# EAGLE board MedBee_Round_Charger_ESP32_mic5350_v12 (EAGLE 9.2.2), part 1 of 2
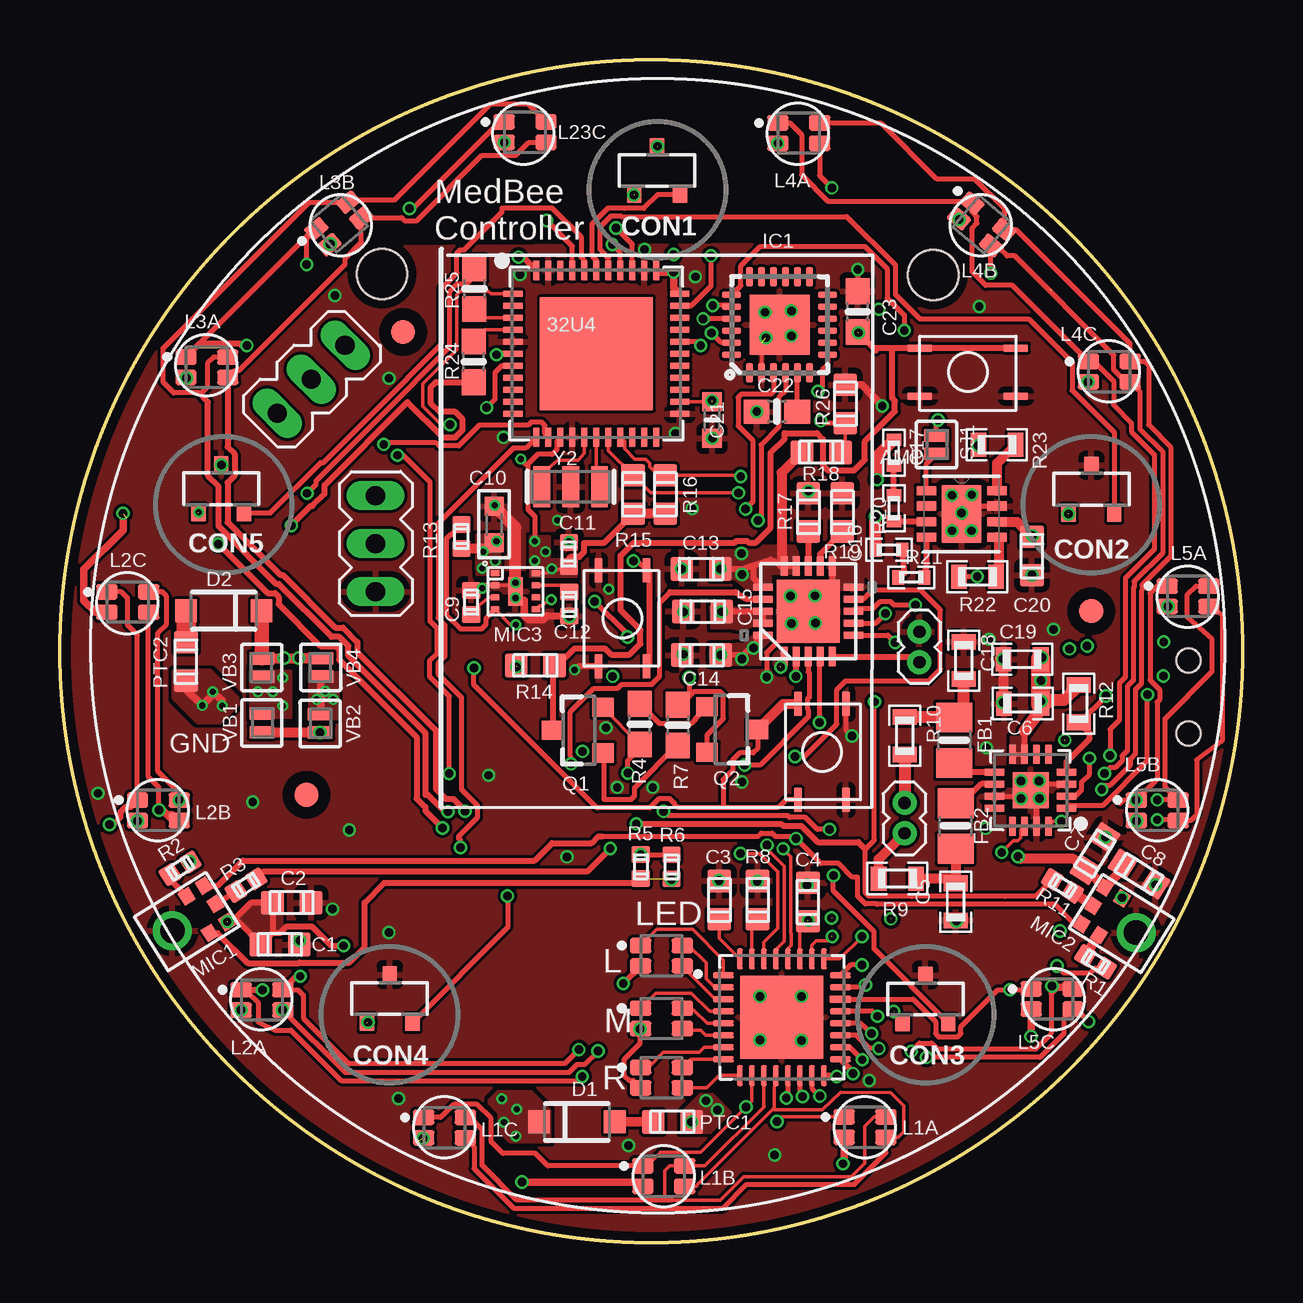
[diagram p0: board, top side]
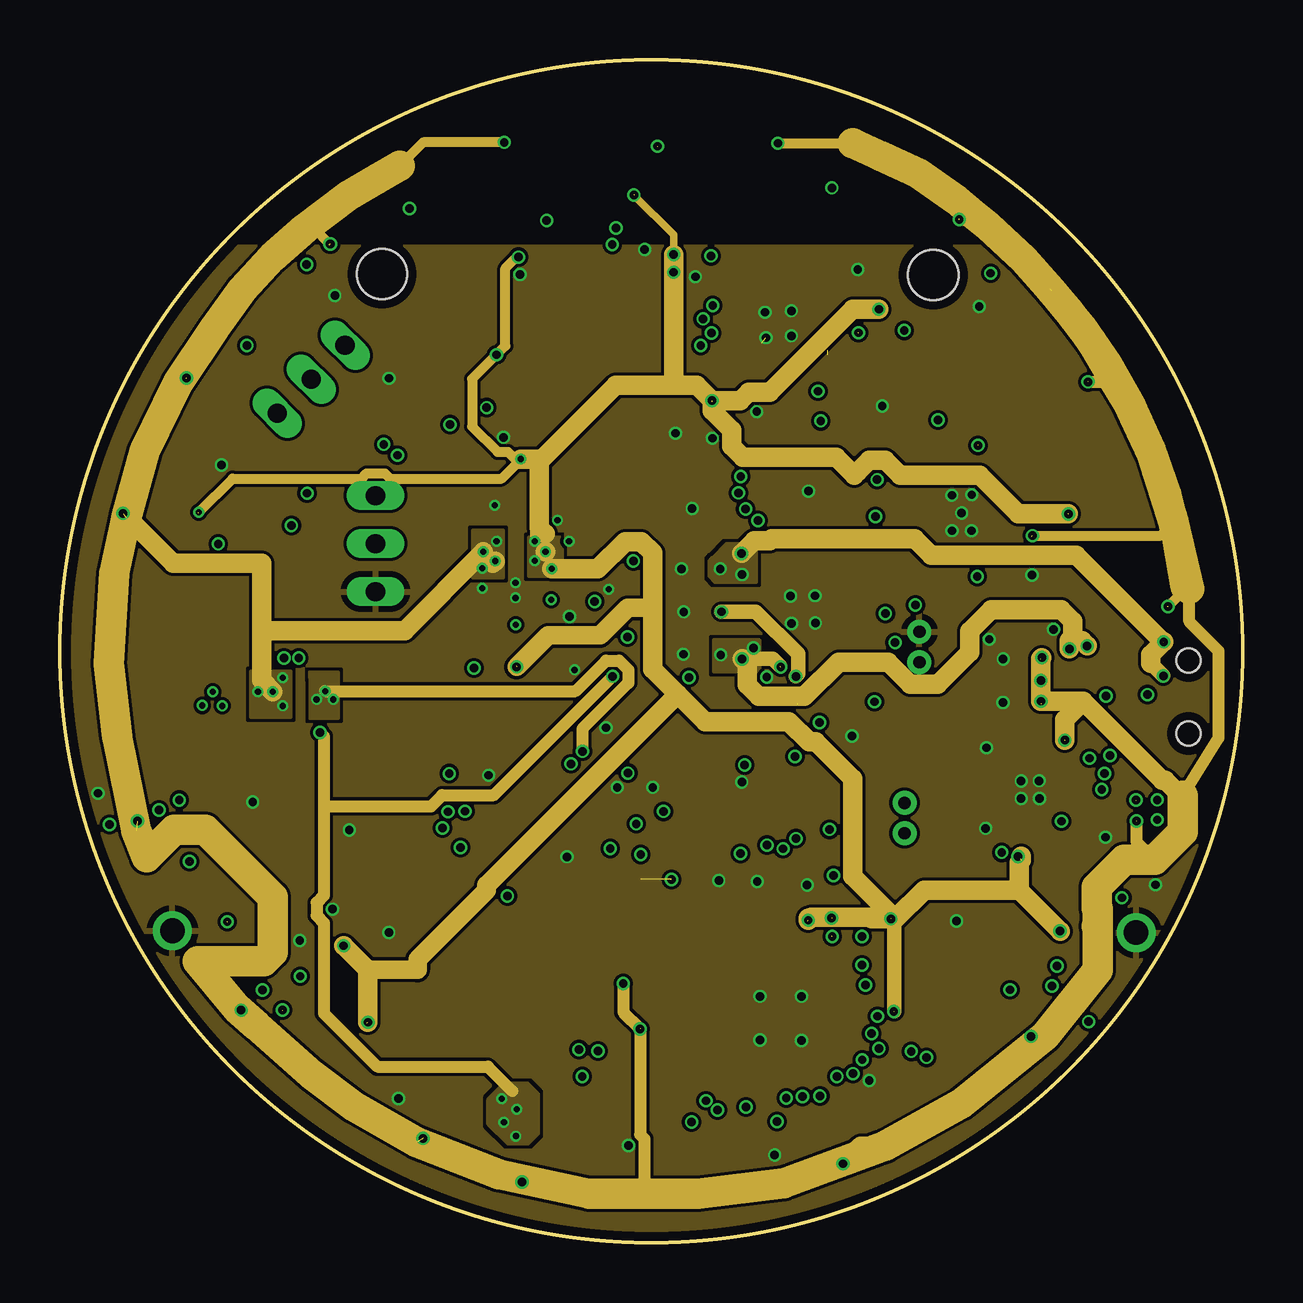
[diagram p1: board, inner layer Route2]
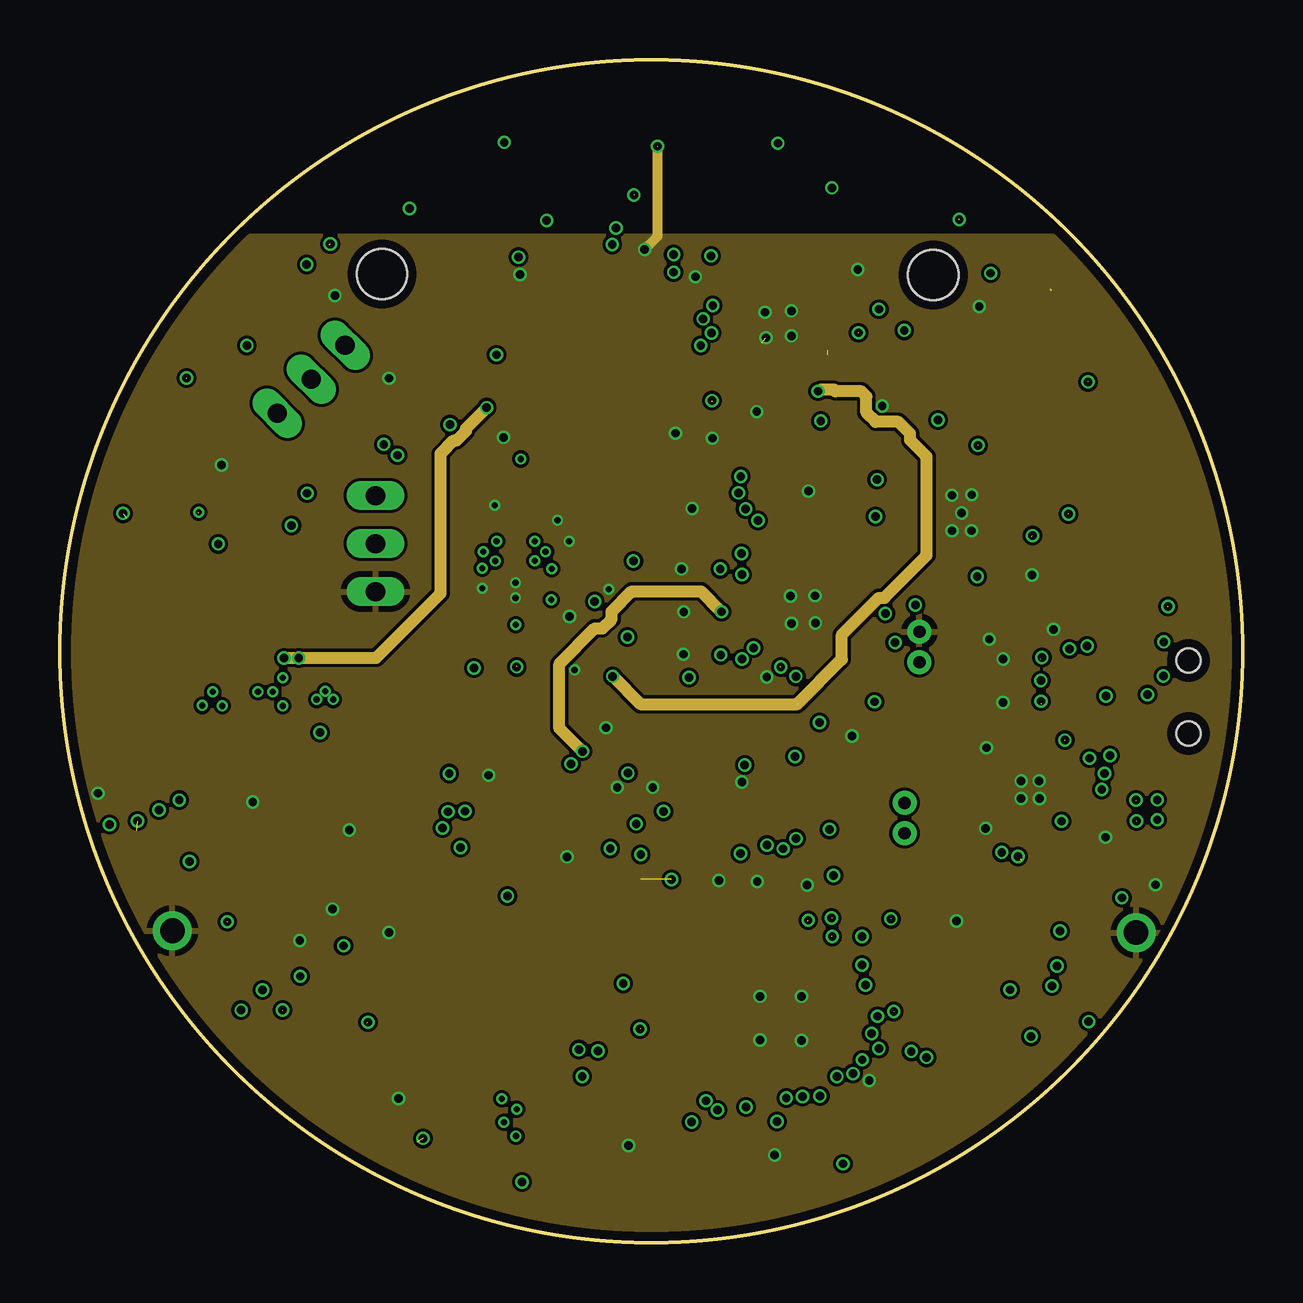
[diagram p2: board, inner layer Route15]
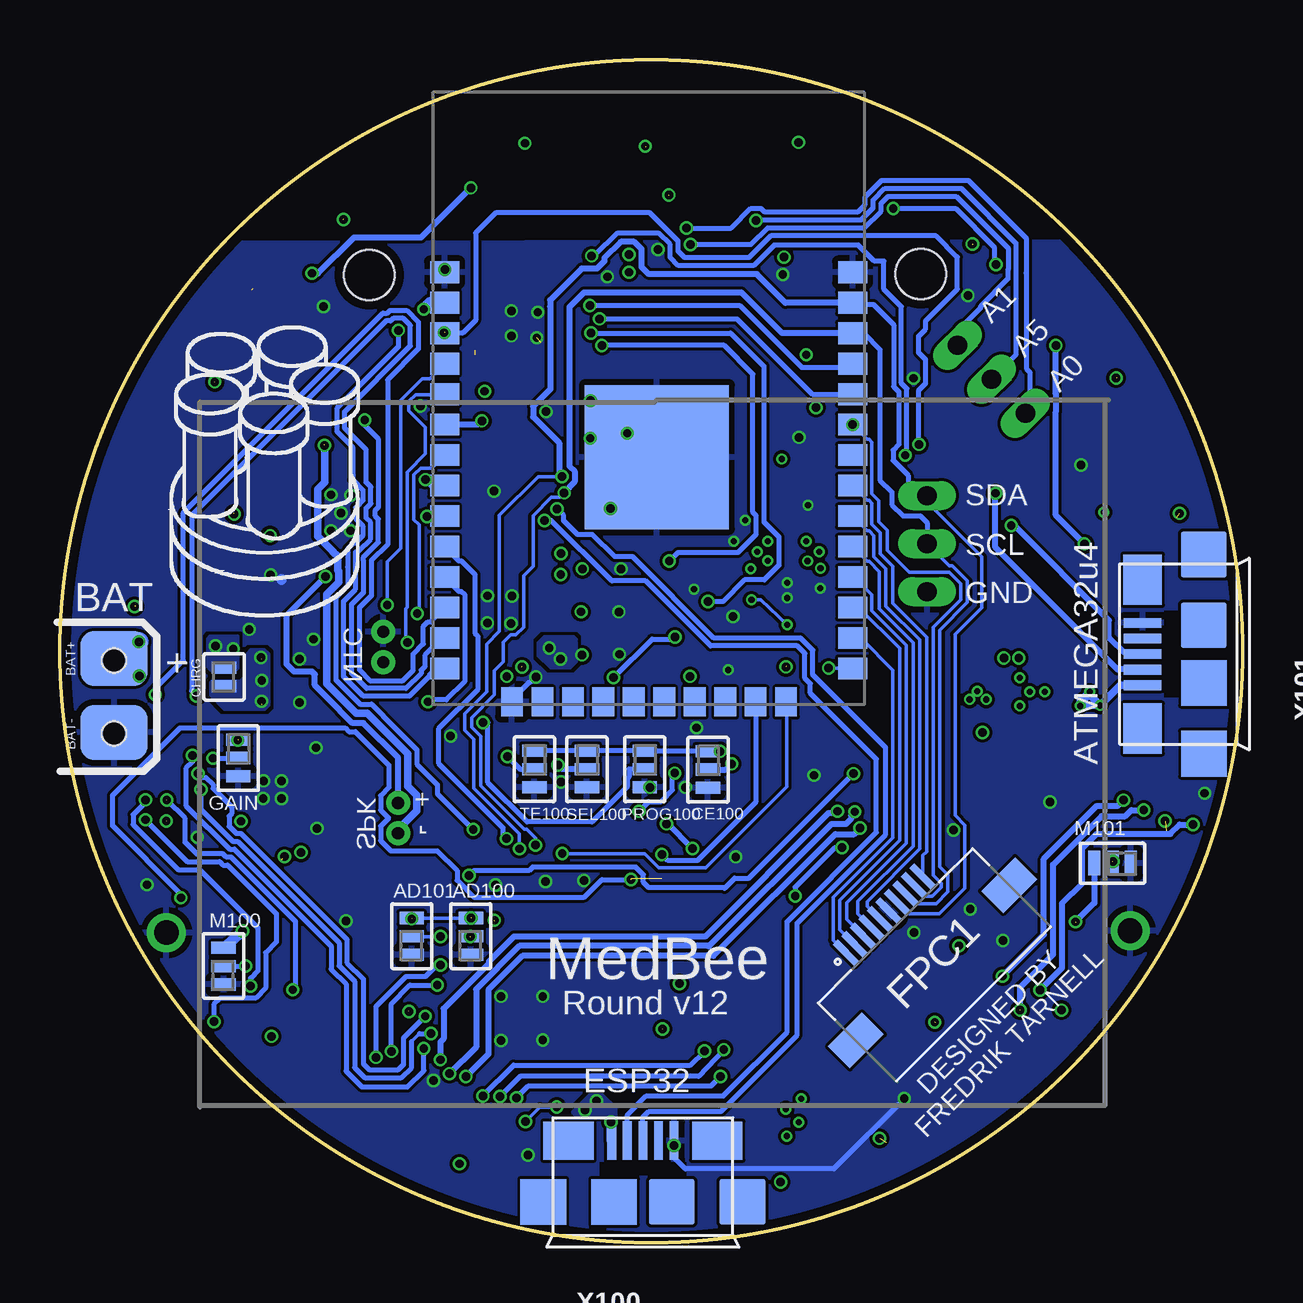
[diagram p3: board, bottom side, seen from below]

Size 49.28 x 49.28 mm. Coordinates in mm from the lower left corner, seen from the top.
Outline: circle at 24.64,24.64 radius 24.64
Copper layers (1*2*15*16): Top 0.035559375mm / dielectric 0.17018125mm / Route2 0.01778125mm / dielectric 47mil / Route15 0.01778125mm / dielectric 0.17018125mm / Bottom 0.035559375mm
Design rules "OSHPark-4layer *": minimum track width 5mil, minimum drill 10mil, track to track 5mil, track to pad 5mil, pad to pad 5mil, via to via 5mil, smd to smd 5mil, copper to edge 15mil, drill to drill 6mil, minimum pad ring 4mil, minimum via ring 4mil, stop-mask expansion 2.5mil, vias tented up to drill 0.4mm, thermal gap 10mil
Net classes: 1 IN: width 0.154 mm; 2 gnd: width 0.102 mm, drill 0.1 mm; 3 usbvcc: width 0.102 mm, drill 0.1 mm, clearance 0.15 mm
Holes 2.1 mm at 36.39,40.32 13.41,40.36

## Footprints (pad centres in the part's own frame; a part is rotated, then mirrored left to right if it is on the bottom)
TQFN44_7MM = smd 0.25 x 0.8: 1 -2.5,-3.475; 2 -2,-3.475; 3 -1.5,-3.475; 4 -1,-3.475; 5 -0.5,-3.475; 6 0,-3.475; 7 0.5,-3.475; 8 1,-3.475; 9 1.5,-3.475; 10 2,-3.475; 11 2.5,-3.475; 23 2.5,3.475; 24 2,3.475; 25 1.5,3.475; 26 1,3.475; 27 0.5,3.475; 28 0,3.475; 29 -0.5,3.475; 30 -1,3.475; 31 -1.5,3.475; 32 -2,3.475; 33 -2.5,3.475 | smd 0.8 x 0.25: 12 3.475,-2.5; 13 3.475,-2; 14 3.475,-1.5; 15 3.475,-1; 16 3.475,-0.5; 17 3.475,0; 18 3.475,0.5; 19 3.475,1; 20 3.475,1.5; 21 3.475,2; 22 3.475,2.5; 34 -3.475,2.5; 35 -3.475,2; 36 -3.475,1.5; 37 -3.475,1; 38 -3.475,0.5; 39 -3.475,0; 40 -3.475,-0.5; 41 -3.475,-1; 42 -3.475,-1.5; 43 -3.475,-2; 44 -3.475,-2.5 | smd 4.7 x 4.7: THERMAL 0,0
PH_2MM_M03 = drill 0.8 long: P$1 0,2.19; P$2 0,0.19; P$3 0,-1.81
QFN20_4X4MC = smd 0.813 x 0.305: 1 -1.892,1; 2 -1.892,0.5; 3 -1.892,0; 4 -1.892,-0.5; 5 -1.892,-1; 11 1.892,-1; 12 1.892,-0.5; 13 1.892,0; 14 1.892,0.5; 15 1.892,1 | smd 0.305 x 0.813: 6 -1,-1.892; 7 -0.5,-1.892; 8 0,-1.892; 9 0.5,-1.892; 10 1,-1.892; 16 1,1.892; 17 0.5,1.892; 18 0,1.892; 19 -0.5,1.892; 20 -1,1.892 | smd 2.642 x 2.642: 21 0,0
SOLDERJUMPER-2WAY_SMALL = smd 0.508 x 1.016: 1 -0.813,0; 2 -0.051,0; 3 0.711,0
SON65P300X300X100-9N = smd 0.813 x 0.381: 1 -1.473,0.965; 2 -1.473,0.33; 3 -1.473,-0.33; 4 -1.473,-0.965; 5 1.473,-0.965; 6 1.473,-0.33; 7 1.473,0.33; 8 1.473,0.965 | smd 1.651 x 2.388: 9 0,0
BUTT_TACT_3X3MM = smd 0.3 x 1: SIDE1 -1,2; SIDE1@1 -1,-2; SIDE2 1,2; SIDE2@1 1,-2
C0603 = smd 1 x 0.95: 1 0,0.8; 2 0,-0.8
0603 = smd 0.65 x 1: 1 -0.775,0; 2 0.775,0
C0402 = smd 0.75 x 0.7: 1 0,0.5; 2 0,-0.5
C0603' = smd 0.8 x 0.8: 1 -0.762,0; 2 0.762,0
0402 = smd 0.5 x 0.6: 1 -0.55,0; 2 0.55,0
_0603MP = smd 0.8 x 0.8: 1 -0.762,0; 2 0.762,0
0603-NO = smd 1.075 x 1: 1 -0.85,0; 2 0.85,0
SOLDERJUMPER-1WAY-SMALL = smd 0.508 x 1.016: 1 -0.813,0; 2 -0.051,0
SOT23-R = smd 0.6 x 0.7: 1 -0.95,-1; 2 0.95,-1; 3 0,1
SOD-123 = smd 0.9 x 0.95: A 1.575,0; C -1.575,0
0805-NO = smd 1.24 x 1.5: 1 -0.95,0; 2 0.95,0
FIDUCIAL_1MM = smd 1 x 1: 1 0,0
MOLEX-FPC-10PIN-0.5MM-PITCH-CONNECTOR = smd 0.3 x 1.3: 1 -2.25,2.54; 2 -1.75,2.54; 3 -1.25,2.54; 4 -0.75,2.54; 5 -0.25,2.54; 6 0.25,2.54; 7 0.75,2.54; 8 1.25,2.54; 9 1.75,2.54; 10 2.25,2.54 | smd 2 x 1.3: Z1 -4.542,-0.317; Z2 4.55,-0.26
QFN24_4MM_SMSC = smd 0.8 x 0.28: 1 -2,1.25; 2 -2,0.75; 3 -2,0.25; 4 -2,-0.25; 5 -2,-0.75; 6 -2,-1.25; 13 2,-1.25; 14 2,-0.75; 15 2,-0.25; 16 2,0.25; 17 2,0.75; 18 2,1.25 | smd 0.28 x 0.8: 7 -1.25,-2; 8 -0.75,-2; 9 -0.25,-2; 10 0.25,-2; 11 0.75,-2; 12 1.25,-2; 19 1.25,2; 20 0.75,2; 21 0.25,2; 22 -0.25,2; 23 -0.75,2; 24 -1.25,2 | smd 2.5 x 2.5: THERM 0,0
LED_0606-RGB = smd 0.89 x 0.64: 1 -0.87,0.425; 2 0.87,0.425; 3 -0.87,-0.425; 4 0.87,-0.425
VQFN-32 = smd 0.88 x 0.26: 1 -2.435,1.75; 2 -2.435,1.25; 3 -2.435,0.75; 4 -2.435,0.25; 5 -2.435,-0.25; 6 -2.435,-0.75; 7 -2.435,-1.25; 8 -2.435,-1.75; 17 2.435,-1.75; 18 2.435,-1.25; 19 2.435,-0.75; 20 2.435,-0.25; 21 2.435,0.25; 22 2.435,0.75; 23 2.435,1.25; 24 2.435,1.75 | smd 0.26 x 0.88: 9 -1.75,-2.435; 10 -1.25,-2.435; 11 -0.75,-2.435; 12 -0.25,-2.435; 13 0.25,-2.435; 14 0.75,-2.435; 15 1.25,-2.435; 16 1.75,-2.435; 25 1.75,2.435; 26 1.25,2.435; 27 0.75,2.435; 28 0.25,2.435; 29 -0.25,2.435; 30 -0.75,2.435; 31 -1.25,2.435; 32 -1.75,2.435 | smd 3.45 x 3.45: 33 0,0
SPH0645LM4H = smd 0.6 x 0.525: 1 -0.9,1.4; 2 -0.9,0.55; 4 0.9,0.55; 5 0.9,1.4; 6 0,1.4 | drill 1.025 pad 1.625: 3 0,-0.71
8PIN-TMLF = smd 1.2 x 0.6: P$0 0,0 | smd 0.25 x 0.35: P$1 -0.75,-0.85; P$2 -0.25,-0.85; P$3 0.25,-0.85; P$4 0.75,-0.85; P$5 0.75,0.85; P$6 0.25,0.85; P$7 -0.25,0.85; P$8 -0.75,0.85
PH_127MM_M02 = drill 0.508 pad 1: 1 0,0; 2 1.27,0
SOT23-3 = smd 0.8 x 0.9: 1 -0.95,-1; 2 0.95,-1; 3 0,1.1
QFN16_3MM = smd 0.8 x 0.28: 1 -1.5,0.75; 2 -1.5,0.25; 3 -1.5,-0.25; 4 -1.5,-0.75; 9 1.5,-0.75; 10 1.5,-0.25; 11 1.5,0.25; 12 1.5,0.75 | smd 0.28 x 0.8: 5 -0.75,-1.5; 6 -0.25,-1.5; 7 0.25,-1.5; 8 0.75,-1.5; 13 0.75,1.5; 14 0.25,1.5; 15 -0.25,1.5; 16 -0.75,1.5 | smd 1.5 x 1.5: THERMAL 0,0
BAT_PCB_PAD_HOLES = smd 2.286 x 2.794: BAT+ -1.981,-0.127; BAT- 1.092,-0.127 | hole 1: 1.143,-0.127; -1.905,-0.127
USB-MICRO = smd 0.4 x 1.6: D+ 0,1.27; D- -0.65,1.27; GND 1.3,1.27; ID 0.65,1.27; VBUS -1.3,1.27 | smd 1.9 x 1.9: SHLD1 -1.2,-1.28; SHLD2 1.2,-1.28; SHLD3 -4.15,-1.28; SHLD4 4.15,-1.28 | smd 2.1 x 1.6: SHLD5 3.1,1.27; SHLD6 -3.1,1.27
WROOM32_SKINNY = smd 1.2 x 0.9: 1 -8.5,5; 2 -8.5,3.73; 3 -8.5,2.46; 4 -8.5,1.19; 5 -8.5,-0.08; 6 -8.5,-1.35; 7 -8.5,-2.62; 8 -8.5,-3.89; 9 -8.5,-5.16; 10 -8.5,-6.43; 11 -8.5,-7.7; 12 -8.5,-8.97; 13 -8.5,-10.24; 14 -8.5,-11.51; 25 8.5,-11.51; 26 8.5,-10.24; 27 8.5,-8.97; 28 8.5,-7.7; 29 8.5,-6.43; 30 8.5,-5.16; 31 8.5,-3.89; 32 8.5,-2.62; 33 8.5,-1.35; 34 8.5,-0.08; 35 8.5,1.19; 36 8.5,2.46; 37 8.5,3.73; 38 8.5,5 | smd 0.9 x 1.2: 15 -5.7,-12.9; 16 -4.43,-12.9; 17 -3.16,-12.9; 18 -1.89,-12.9; 19 -0.62,-12.9; 20 0.65,-12.9; 21 1.92,-12.9; 22 3.19,-12.9; 23 4.46,-12.9; 24 5.73,-12.9 | smd 6 x 6: P$1 0.34,-2.7
RESONATOR-SMD = smd 0.7 x 1.7: 1 -1.2,0; 2 0,0; 3 1.2,0

## Placement (x,y rotation side)
32U4  ATMEGA32U4-MU  [TQFN44_7MM]  22.35,37.03 270 top
$$U$4  PH_2MM_M03  [PH_2MM_M03]  13.15,29.31 180 top
$$U$5  MEDBEE-PLACEMENT  [MEDBEE_ROUND_PLACEMENT]  24.9,24.87 0 top
$$U$6  MCP73871  [QFN20_4X4MC]  31.18,26.31 90 top
$$U$7  PH_2MM_M03  [PH_2MM_M03]  10.6,36.11 135 top
AD100  TE  [SOLDERJUMPER-2WAY_SMALL]  32.16,12.81 90 bottom
AD101  TE  [SOLDERJUMPER-2WAY_SMALL]  34.62,12.81 90 bottom
AMP  TPA2005D1DRBR  [SON65P300X300X100-9N]  37.57,30.36 0 top
BUTT_GEN  BUTT_TACT_3X3MM  [BUTT_TACT_3X3MM]  31.75,20.45 180 top
BUTT_GEN1  BUTT_TACT_3X3MM  [BUTT_TACT_3X3MM]  23.44,26.01 0 top
BUTT_RES  BUTT_TACT_3X3MM  [BUTT_TACT_3X3MM]  37.83,36.27 90 top
C1  0.1u  [C0603]  9.17,12.42 270 top
C2  200p  [C0603]  9.66,14.16 270 top
C3  1uF  [C0603]  27.47,14.27 0 top
C4  1uF  [C0603]  31.16,14.19 180 top
C5  220pF  [0603]  37.32,14.2 270 top
C6  0.1uF  [0603]  40.11,22.46 180 top
C7  200p  [C0603]  43.12,16.21 328 top
C8  0.1u  [C0603]  44.96,15.36 238 top
C9  0.1uF  [C0402]  17.13,26.67 180 top
C10  1uF  [C0603']  18.09,29.93 90 top
C11  2.2uF  [C0402]  21.2,28.68 180 top
C12  2.2uF  [C0402]  21.22,26.6 0 top
C13  4.7uF  [C0603]  26.71,28.07 90 top
C14  4.7uF  [C0603]  26.73,24.48 90 top
C15  10uF  [C0603]  26.77,26.3 90 top
C16  3.3nF  [0402]  34.54,28.87 0 top
C17  3.3nF  [0402]  34.75,32.91 270 top
C18  220pF  [0603]  37.66,24.25 90 top
C19  10uF  [0603]  40.09,24.31 180 top
C20  1uF  [C0603]  40.5,28.61 180 top
C21  1uF  [_0603MP]  27.17,34.27 270 top
C22  1uF  [0603-NO]  29.87,34.63 180 top
C23  1uF  [0603-NO]  33.24,38.79 90 top
CE100  CE  [SOLDERJUMPER-2WAY_SMALL]  22.28,19.66 270 bottom
CHRG  SOLDERJUMPER-1WAY  [SOLDERJUMPER-1WAY-SMALL]  42.44,24 90 bottom
CON1  RR-120-MAGNETIC-SWITCH  [SOT23-R]  13.74,10.17 0 top
CON2  RR-120-MAGNETIC-SWITCH  [SOT23-R]  36.06,10.15 0 top
CON3  RR-120-MAGNETIC-SWITCH  [SOT23-R]  6.72,31.41 0 top
CON4  RR-120-MAGNETIC-SWITCH  [SOT23-R]  42.98,31.39 0 top
CON5  RR-120-MAGNETIC-SWITCH  [SOT23-R]  24.88,44.67 0 top
D1  MBR120  [SOD-123]  21.54,5.03 0 top
D2  MBR120  [SOD-123]  6.83,26.33 180 top
FB1  Ferrite  [0805-NO]  37.26,20.93 90 top
FB2  Ferrite  [0805-NO]  37.32,17.36 270 top
FID1  FIDUCIAL""  [FIDUCIAL_1MM]  10.27,18.66 0 top
FID2  FIDUCIAL""  [FIDUCIAL_1MM]  42.97,26.31 0 top
FID3  FIDUCIAL""  [FIDUCIAL_1MM]  14.3,37.94 0 top
FPC1  MOLEX-FPC-10PIN-0.5MM-PITCH-CONNECTOR  [MOLEX-FPC-10PIN-0.5MM-PITCH-CONNECTOR]  13.13,11.86 45 bottom
GAIN  TE  [SOLDERJUMPER-2WAY_SMALL]  41.85,20.14 270 bottom
IC1  CP2104  [QFN24_4MM_SMSC]  29.98,38.25 90 top
L1A  LED_RGB_COMMON_ANODE  [LED_0606-RGB]  33.54,4.81 0 top
L1B  LED_RGB_COMMON_ANODE  [LED_0606-RGB]  25.16,2.77 0 top
L1C  LED_RGB_COMMON_ANODE  [LED_0606-RGB]  16.02,4.79 0 top
L2A  LED_RGB_COMMON_ANODE  [LED_0606-RGB]  8.42,10.11 0 top
L2B  LED_RGB_COMMON_ANODE  [LED_0606-RGB]  4.1,18.01 0 top
L2C  LED_RGB_COMMON_ANODE  [LED_0606-RGB]  2.82,26.69 0 top
L3A  LED_RGB_COMMON_ANODE  [LED_0606-RGB]  6.12,36.47 0 top
L3B  LED_RGB_COMMON_ANODE  [LED_0606-RGB]  11.62,42.47 40 top
L4A  LED_RGB_COMMON_ANODE  [LED_0606-RGB]  30.78,46.23 0 top
L4B  LED_RGB_COMMON_ANODE  [LED_0606-RGB]  38.4,42.43 320 top
L4C  LED_RGB_COMMON_ANODE  [LED_0606-RGB]  43.72,36.29 0 top
L5A  LED_RGB_COMMON_ANODE  [LED_0606-RGB]  47,26.93 0 top
L5B  LED_RGB_COMMON_ANODE  [LED_0606-RGB]  45.72,18.01 0 top
L5C  LED_RGB_COMMON_ANODE  [LED_0606-RGB]  41.34,10.15 0 top
L23C  LED_RGB_COMMON_ANODE  [LED_0606-RGB]  19.38,46.27 0 top
LED  LP5024  [VQFN-32]  30.08,9.39 0 top
LED_LEFT  LED_RGB_COMMON_ANODE  [LED_0606-RGB]  25.06,11.95 0 top
LED_MIDDLE  LED_RGB_COMMON_ANODE  [LED_0606-RGB]  25.06,9.34 0 top
LED_RIGHT  LED_RGB_COMMON_ANODE  [LED_0606-RGB]  25.06,6.87 0 top
M100  TE  [SOLDERJUMPER-2WAY_SMALL]  42.46,11.57 90 bottom
M101  TE  [SOLDERJUMPER-2WAY_SMALL]  5.47,15.81 180 bottom
MIC1  MIC_I2S_SPH0645  [SPH0645LM4H]  5.29,13.37 302 top
MIC2  MIC_I2S_SPH0645  [SPH0645LM4H]  44.24,13.29 58 top
MIC3  MIC5350  [8PIN-TMLF]  18.98,27.13 270 top
NTC1  PH_127MM_M02  [PH_127MM_M02]  35.81,25.45 270 top
PROG100  PROG2  [SOLDERJUMPER-2WAY_SMALL]  24.91,19.68 270 bottom
PTC1  [C0603]  25.52,5.03 270 top
PTC2  [C0603]  5.25,24.21 180 top
Q1  mmbt2222  [SOT23-3]  21.63,21.35 90 top
Q2  mmbt2222  [SOT23-3]  27.96,21.38 270 top
R1  1M  [C0402]  43.15,11.7 238 top
R2  1M  [C0402]  5.01,15.6 302 top
R3  68  [C0402]  7.76,14.9 122 top
R4  10K  [0603-NO]  24.16,21.6 90 top
R5  0  [C0402]  24.2,15.67 0 top
R6  0  [C0402]  25.48,15.66 0 top
R7  10K  [0603-NO]  25.74,21.56 270 top
R8  10k  [C0603]  29.07,14.27 0 top
R9  1k  [0603]  34.89,15.17 180 top
R10  1k  [0603]  35.2,21.12 270 top
R11  68  [C0402]  41.77,14.86 238 top
R12  1M  [0603]  42.45,22.46 90 top
R13  100k  [C0402]  16.73,29.41 180 top
R14  10k  [C0603]  19.81,24.04 270 top
R15  10k  [C0603]  23.88,31.17 0 top
R16  10k  [C0603]  25.22,31.17 0 top
R17  10k  [C0603]  31.18,30.43 0 top
R18  470k  [C0603]  31.72,32.93 270 top
R19  10k  [C0603]  32.59,30.43 0 top
R20  150k1%  [0402]  34.75,30.6 270 top
R21  150k1%  [0402]  35.47,27.72 0 top
R22  1k  [0603]  38.23,27.75 180 top
R23  1k  [0603]  39.04,33.25 180 top
R24  22  [0603-NO]  17.24,36.7 90 top
R25  22  [0603-NO]  17.27,39.75 270 top
R26  10k  [C0603]  32.72,34.94 0 top
SEL100  SEL  [SOLDERJUMPER-2WAY_SMALL]  27.32,19.68 270 bottom
SJ1  SOLDERJUMPER-1WAY  [SOLDERJUMPER-1WAY-SMALL]  36.52,32.82 270 top
SPK1  PH_127MM_M02  [PH_127MM_M02]  35.19,17.05 90 top
TE100  TE  [SOLDERJUMPER-2WAY_SMALL]  29.51,19.68 270 bottom
U1  MAX98357A  [QFN16_3MM]  40.44,18.85 180 top
U$100  BAT_PCB_PAD_HOLES  [BAT_PCB_PAD_HOLES]  46.9,22.35 270 bottom
VB1  SOLDERJUMPER-1WAY  [SOLDERJUMPER-1WAY-SMALL]  8.41,21.22 270 top
VB2  SOLDERJUMPER-1WAY  [SOLDERJUMPER-1WAY-SMALL]  10.84,21.2 270 top
VB3  SOLDERJUMPER-1WAY  [SOLDERJUMPER-1WAY-SMALL]  8.41,24.39 90 top
VB4  SOLDERJUMPER-1WAY  [SOLDERJUMPER-1WAY-SMALL]  10.87,24.4 90 top
X100  20329  [USB-MICRO]  24.99,2.98 0 bottom
X101  microUSB  [USB-MICRO]  2.89,24.52 90 bottom
X102  ESP32_WROOM32_SKINNY  [WROOM32_SKINNY]  24.75,35.43 0 bottom
Y2  8MHz  [RESONATOR-SMD]  21.28,31.5 180 top

## Library data of the parts
32U4 C21-C23 FB1 FB2 FID1-FID3 IC1 MIC1 MIC2 R4 R7 R24 R25 U1 X102 = microbuilder
$$U$4 $$U$5 $$U$7 AD100 AD101 BUTT_GEN BUTT_GEN1 BUTT_RES CE100 CHRG CON1-CON5 FPC1 GAIN L1A L1B L1C L2A L2B L2C L3A L3B L4A L4B L4C L5A L5B L5C L23C LED LED_LEFT LED_MIDDLE LED_RIGHT M100 M101 NTC1 PROG100 SEL100 SJ1 SPK1 TE100 U$100 VB1-VB4 X101 = Frippe3
$$U$6 = MCP73871
AMP = TPA2005D1DRBR; AVAILABILITY: Unavailable; DESCRIPTION: Amplifiers - Audio Power Mono, Fully Diff, Filter-Free Class-D; MF: Texas Instruments; MP: TPA2005D1DRBR; PACKAGE: SON-8 Texas Instruments; PRICE: None
C1-C4 C7-C9 C11-C15 C20 PTC1 PTC2 R1-R3 R5 R6 R8 R11 R13-R19 R26 = Arduino
C5 C6 C16-C19 R9 R10 R12 R20-R23 = standardpart
C10 = rc-master-smd
D1 D2 = SparkFun-DiscreteSemi
MIC3 = Frippe2; PARTNR: MIC5350-SGYMT
Q1 Q2 Y2 = SparkFun
X100 = Frippe3; SPICEPREFIX: X

## Nets
0: 32U4.20
1: 32U4.21
1V8 [gnd]: C12.1 MIC3.P$7
3V3: 32U4.6 32U4.14 32U4.24 32U4.33 32U4.34 32U4.44 AD100.3 AD101.3 C1.2 C2.2 C4.1 C7.2 C8.2 C11.1 C21.1 CON1.1 CON2.1 CON3.1 CON4.1 CON5.1 LED.27 M100.3 M101.3 MIC1.5 MIC2.5 MIC3.P$8 R14.2 R15.2 R16.2 X102.2
5: 32U4.31
6: 32U4.27
8: 32U4.28
9: 32U4.29 BUTT_GEN1.SIDE2 BUTT_GEN1.SIDE2@1
10: 32U4.30
12: 32U4.26
A0: 32U4.36 $$U$7.P$1
A1: 32U4.37 $$U$7.P$3
A5: 32U4.41 $$U$7.P$2
A5_IO4: FPC1.1 X102.26
AREF: 32U4.42
BAT: $$U$6.14 $$U$6.15 $$U$6.16 C13.2 R18.2 U$100.BAT+
BAT_ADC: R18.1 R26.2 X102.6
BCLK: U1.16
BYP1: C9.1 MIC3.P$3
CHARGE_IN: $$U$6.2 $$U$6.18 $$U$6.19 C15.2 CE100.1 PROG100.1 SEL100.1 TE100.1 VB2.1 VB4.1
CHARGE_OUT: $$U$6.1 $$U$6.20 C14.2 CHRG.2
CHARGING: $$U$6.7 X102.7
CON1: 32U4.39 CON5.2
CON2: 32U4.38 CON4.2
CON3: 32U4.32 CON2.2
CON4: 32U4.12 CON1.2
CON5: 32U4.40 CON3.2
D4_RST: 32U4.25
D+1: 32U4.4 R24.2
D-1: 32U4.3 R25.2
DTR: IC1.23 Q2.2 R7.1
EN_MIC1 [usbvcc]: MIC3.P$4 MIC3.P$5 R13.2
GND: 32U4.5 32U4.15 32U4.23 32U4.35 32U4.43 $$U$4.P$1 $$U$6.10 $$U$6.11 $$U$6.21 AD100.1 AD101.1 AMP.7 AMP.9 BUTT_GEN1.SIDE1 BUTT_GEN1.SIDE1@1 BUTT_GEN.SIDE1 BUTT_GEN.SIDE1@1 BUTT_RES.SIDE1 BUTT_RES.SIDE1@1 C1.1 C2.1 C3.1 C4.2 C5.2 C6.2 C7.1 C8.1 C9.2 C10.2 C11.2 C12.2 C13.1 C14.1 C15.1 C18.2 C19.2 C20.1 C21.2 C22.2 C23.2 CE100.3 CON1.3 CON2.3 CON3.3 CON4.3 CON5.3 FPC1.6 GAIN.3 IC1.2 IC1.THERM LED.33 M100.1 M101.1 MIC1.3 MIC2.3 MIC3.P$0 MIC3.P$2 NTC1.1 PROG100.3 R8.1 R17.1 R19.1 R26.1 SEL100.3 TE100.3 U1.3 U1.11 U1.15 U1.THERMAL U$100.BAT- X100.GND X101.GND X102.1 X102.15 X102.38 X102.P$1 Y2.2
GPIO0: BUTT_GEN.SIDE2 BUTT_GEN.SIDE2@1 Q2.3 X102.25
IN [IN]: AMP.6 C6.1 C10.1 C19.1 C20.2 CHRG.1 GAIN.1 L1A.3 L1B.3 L1C.3 L2A.3 L2B.3 L2C.3 L3A.3 L3B.3 L4A.3 L4B.3 L4C.3 L5A.3 L5B.3 L5C.3 L23C.3 LED_LEFT.3 LED_MIDDLE.3 LED_RIGHT.3 MIC3.P$1 R12.2 R13.1 U1.7 U1.8 VB1.1 VB3.1
IO12_A11: R12.1 U1.4 X102.14
IO13: X102.16
IO15: R5.1 R6.1 X102.23
IO16: FPC1.2 X102.27
IO17: FPC1.3 X102.28
IO27_A10: U1.1 X102.12
LED0: LED.1 LED_LEFT.1
LED1: LED.2 LED_LEFT.2
LED2: LED.3 LED_LEFT.4
LED3: LED.4 LED_MIDDLE.1
LED4: LED.5 LED_MIDDLE.2
LED5: LED.6 LED_MIDDLE.4
LED6: LED.7 LED_RIGHT.1
LED7: LED.8 LED_RIGHT.2
LED8: LED.9 LED_RIGHT.4
LED9: L1A.1 L1B.1 L1C.1 LED.10
LED10: L1A.2 L1B.2 L1C.2 LED.11
LED11: L1A.4 L1B.4 L1C.4 LED.12
LED12: L2A.1 L2B.1 L2C.1 LED.13
LED13: L2A.2 L2B.2 L2C.2 LED.14
LED14: L2A.4 L2B.4 L2C.4 LED.15
LED15: L3A.1 L3B.1 L23C.1 LED.16
LED16: L3A.2 L3B.2 L23C.2 LED.17
LED17: L3A.4 L3B.4 L23C.4 LED.18
LED18: L4A.1 L4B.1 L4C.1 LED.19
LED19: L4A.2 L4B.2 L4C.2 LED.20
LED20: L4A.4 L4B.4 L4C.4 LED.21
LED21: L5A.1 L5B.1 L5C.1 LED.22
LED22: L5A.2 L5B.2 L5C.2 LED.23
LED23: L5A.4 L5B.4 L5C.4 LED.24
LED_EN: LED.30 X102.24
LOWBAT: $$U$6.8 X102.4
LRCLK: U1.14
MCP_CE: $$U$6.17 CE100.2
MCP_PROG2: $$U$6.4 PROG100.2
MCP_SEL: $$U$6.3 SEL100.2
MCP_TE: $$U$6.9 TE100.2
MIC_BCLK: MIC1.4 MIC2.4 R5.2 R6.2
MIC_DOUT: R3.2 R11.2 X102.11
MIC_LRCL: MIC1.1 MIC2.1 X102.10
MISO: FPC1.10 X102.31
MOSI: FPC1.5 X102.30
N$1: Q1.1 R7.2
N$3: AD101.2 LED.25
N$4: Q2.1 R4.2
N$5: LED.31 R8.2
N$6: D1.A PTC1.2
N$7: 32U4.16 Y2.3
N$8: 32U4.17 Y2.1
N$9: IC1.3 X100.D+
N$10: IC1.4 X100.D-
N$11: C22.1 IC1.5 IC1.6
N$12: PTC1.1 X100.VBUS
N$13: R24.1 X101.D+
N$14: R25.1 X101.D-
N$15: D2.A PTC2.2
N$16: $$U$6.12 R19.2
N$17: $$U$6.13 R17.2
N$18: $$U$6.5 NTC1.2
N$19: PTC2.1 X101.VBUS
N$20: AD100.2 LED.26
N$21: AMP.3 R20.2
N$22: R10.2 R22.2 SPK1.2
N$23: AMP.4 R21.2
N$24: C16.2 R21.1
N$25: C17.2 R20.1
N$26: GAIN.2 U1.2
N$27: R9.2 R23.2 SPK1.1
N$28: FB2.1 U1.10
N$29: FB1.1 U1.9
N$30: MIC1.6 R3.1
N$32: M101.2 R2.1
N$33: MIC2.6 R11.1
N$34: M100.2 R1.1
PG: $$U$6.6 X102.5
RESET: 32U4.13 BUTT_RES.SIDE2 BUTT_RES.SIDE2@1 C23.1 Q1.3 R14.1 X102.3
RTS: IC1.19 Q1.2 R4.1
RXD0: IC1.21 X102.34
SCK: FPC1.4 X102.29
SCL: 32U4.18 $$U$4.P$2 FPC1.8 LED.29 R15.1 X102.36
SDA: 32U4.19 $$U$4.P$3 FPC1.7 LED.28 R16.1 X102.37
SELECT: MIC1.2 R2.2
SELECT2: MIC2.2 R1.2
SPK+: C17.1 X102.8
SPK-: C16.1 X102.9
SPK_EN: SJ1.1 X102.13
TXD0: IC1.20 X102.35
UNUSED1: 32U4.11
UNUSED2: 32U4.10
UNUSED3: 32U4.9
VBUS1: 32U4.7 D2.C VB3.2 VB4.2
VBUS2: D1.C IC1.7 IC1.8 VB1.2 VB2.2
VCAP1: C3.2 LED.32
VO2+: AMP.5 R22.1
VO2-: AMP.8 R23.1
VO+: C18.1 FB1.2 R10.1
VO-: C5.1 FB2.2 R9.1
WAKE: 32U4.1 FPC1.9 X102.33
X: AMP.1 SJ1.2